# Altium PCB powersuppy.PcbDoc (part 1 of 2)
Units mm, origin at the board's own origin, x right, y up, seen from the top; angles counter-clockwise.
Board outline 153.8 x 127.13 mm, 2 copper layers (Top Layer, Bottom Layer); 131 components, 99 nets, 426 pads, 176 vias.
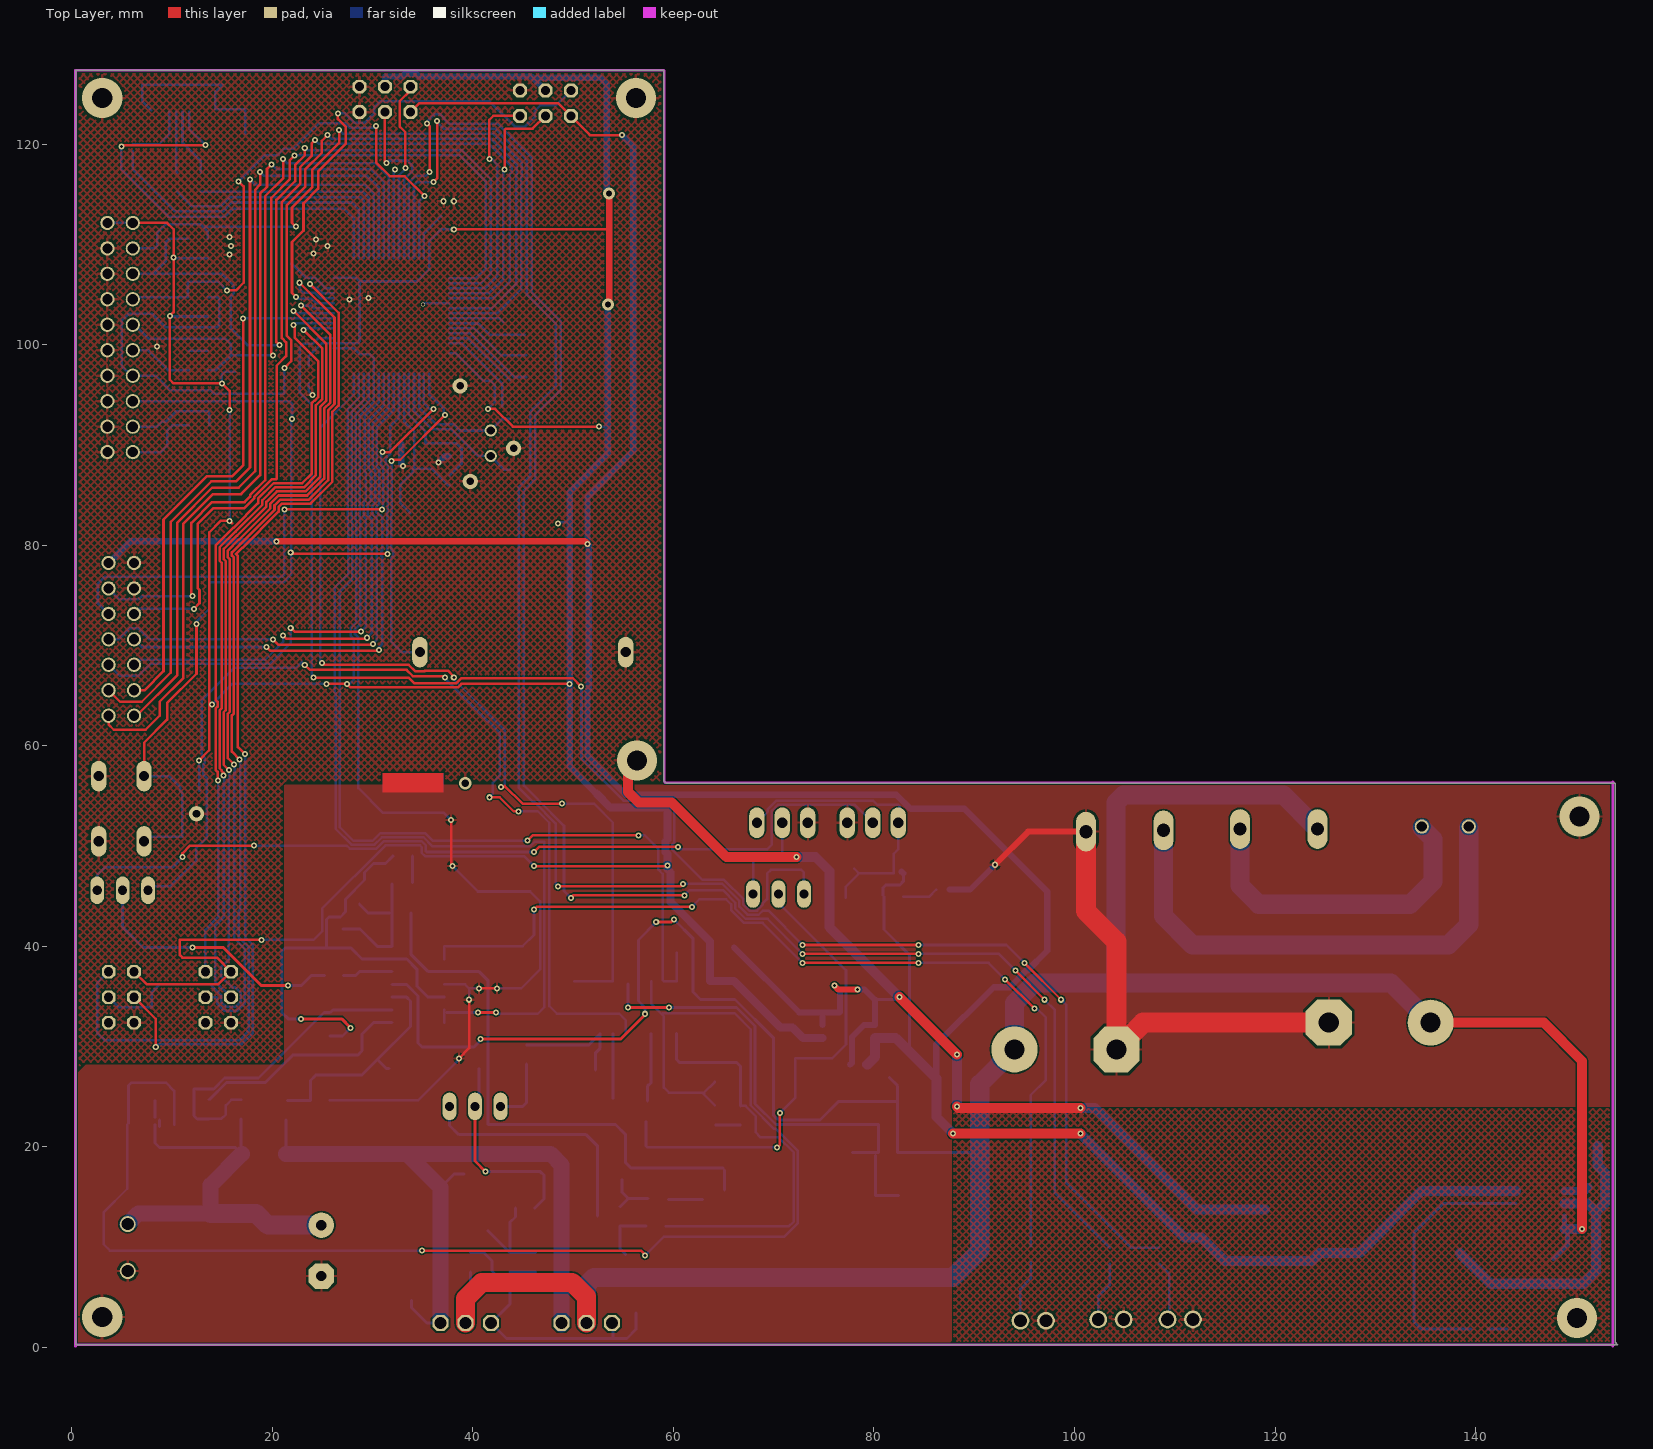
[diagram p0: Top Layer view]
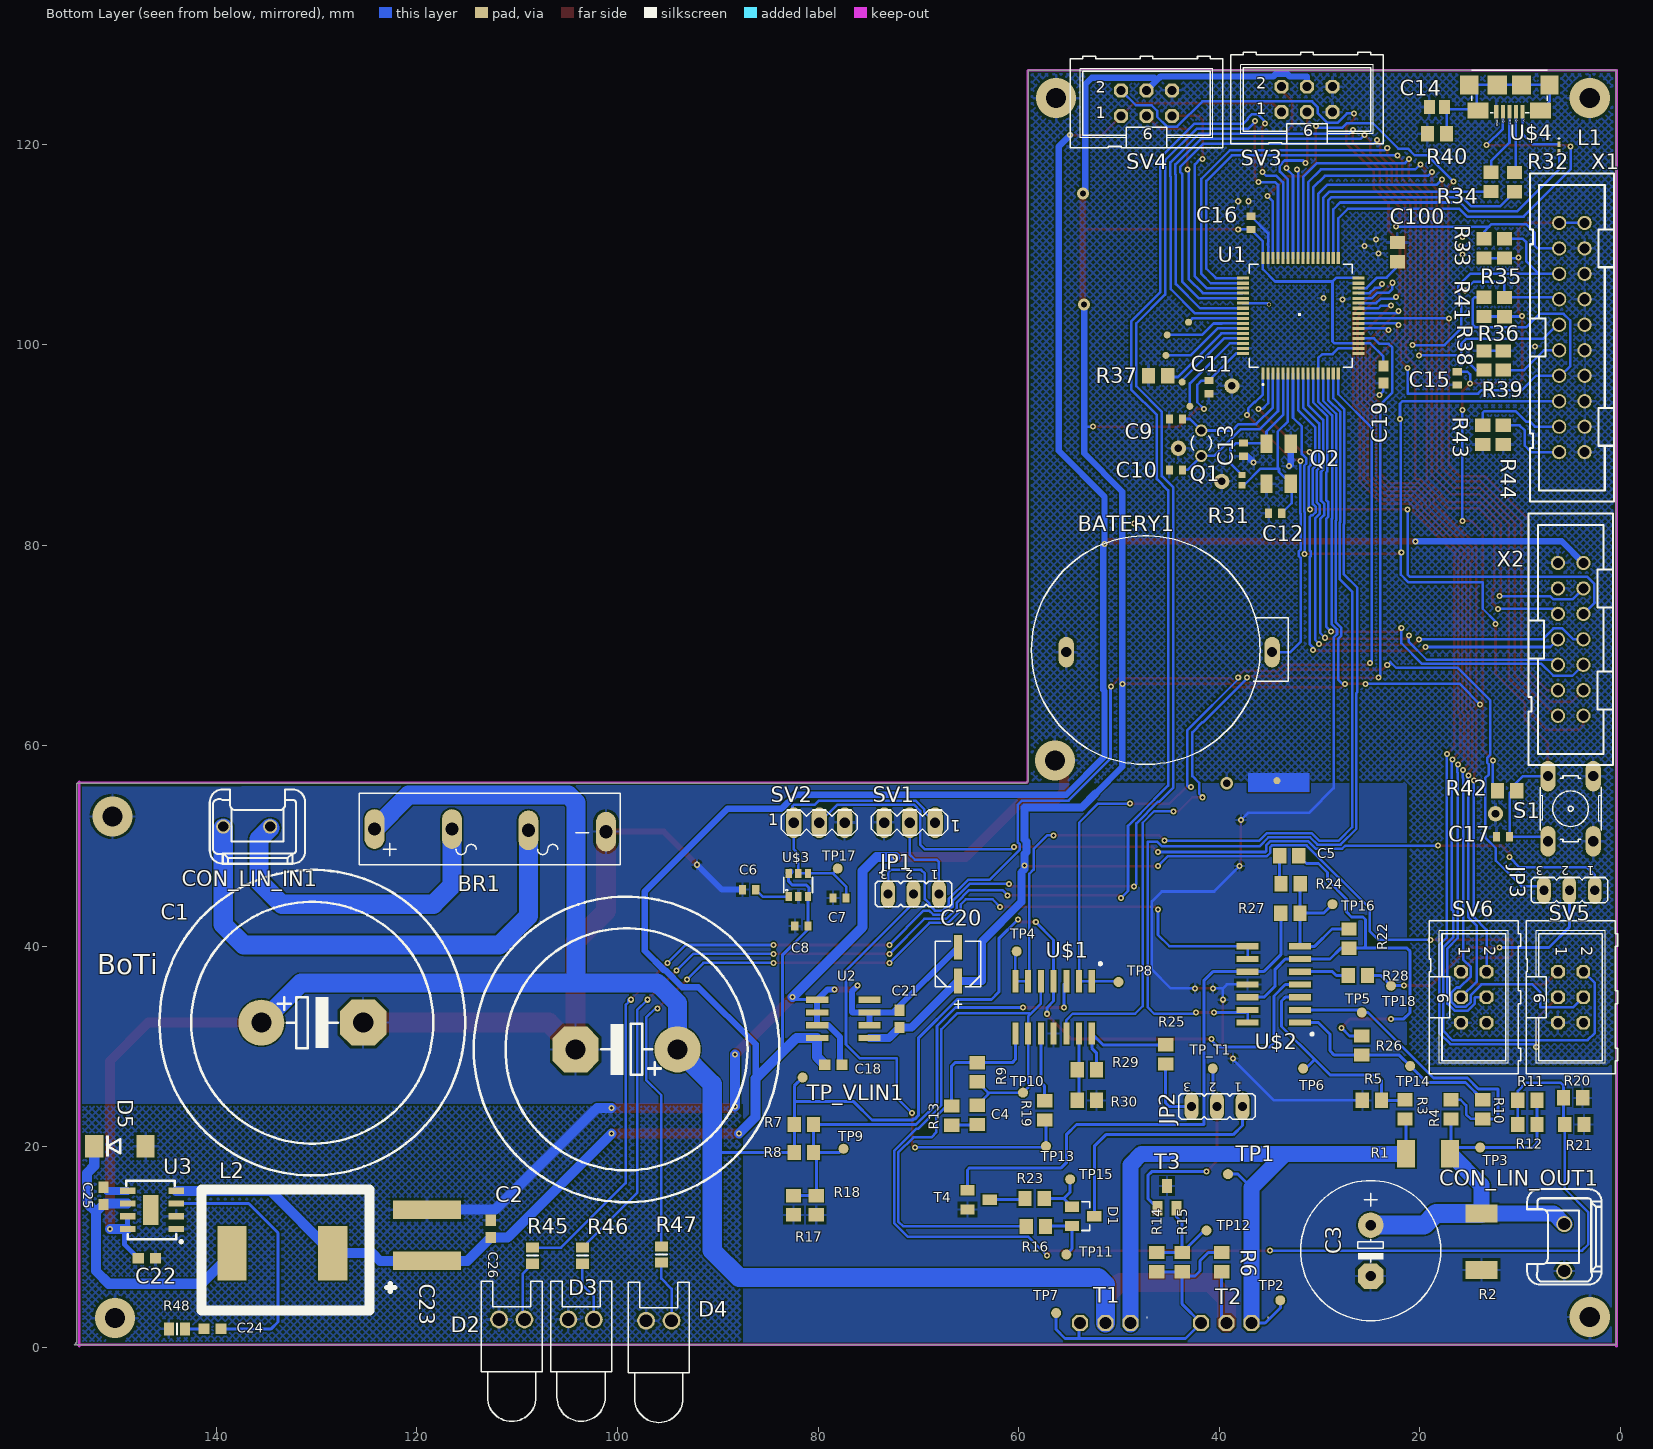
[diagram p1: Bottom Layer view, seen from below]

## Layer stack, top to bottom
Top Solder: solder mask 0.0102, Solder Resist, Dk 3.5
Top Layer: signal copper 0.0356
Dielectric 1: dielectric 0.32, FR-4, Dk 4.8
Bottom Layer: signal copper 0.0356
Bottom Solder: solder mask 0.0102, Solder Resist, Dk 3.5

## Board outline
0.381,127.382 0.411,127.352 59.056,127.352 59.056,56.475 59.27,56.261 153.924,56.261 153.924,0.508 154.178,0.254 0.381,0.254

## Design rules (kind name [scope] priority, off if disabled: settings)
Clearance [All] p1: gap=0.152 ignorepadtopadclearanceinfootprint=FALSE
ComponentClearance [All] p1 off: gap=0.254 collisioncheckmode=3 verticalgap=0.254 showdistances=FALSE
PolygonConnect [All] p1: connectstyle=Relief reliefconductorwidth=0.254 reliefentries=4 polygonreliefangle="90 Angle" airgapwidth=0.254
RoutingVias [All] p1: holewidth=0.3 width=0.6 viastyle="Through Hole" minholewidth=0.3 minwidth=0.6 maxholewidth=0.711 maxwidth=1.27
SolderMaskExpansion [All] p1: expansion=0.102
Width [All] p1: maxlimit=2.54 minlimit=0.254 preferedwidth=0.254
29 further rules are at their usual default settings.

## Classes and differential pairs
component class powersupply_grid8_0: BR1 C1 C2 C3 C4 C5 C6 C7 C8 CON_LIN_IN1 CON_LIN_OUT1 D1 D4 JP1 JP2 JP3 R1 R2 R3 R4 R5 R6 R7 R8 R9 R10 R11 R12 R13 R14 R15 R16 R17 R18 R19 R20 R21 R22 R23 R24 R25 R26 R27 R28 R29 R30 R47 SV1 SV2 T1 T2 T3 T4 TP1 TP2 TP3 TP4 TP5 TP6 TP7 TP8 TP9 TP10 TP11 TP12 TP13 TP14 TP15 TP16 TP17 TP18 TP_T1 TP_VLIN1 U$1 U$2 U$3
component class powersupply_grid8_1: BATERY1 C9 C10 C11 C12 C13 C14 C15 C16 C17 C18 C19 C20 C21 C22 C23 C24 C25 C26 C100 D2 D3 D5 L1 L2 Q1 Q2 R31 R32 R33 R34 R35 R36 R37 R38 R39 R40 R41 R42 R43 R44 R45 R46 R48 S1 SV3 SV4 SV5 SV6 U1 U2 U3 U$4 U$5 U$6 X1 X2

## Components (designator, comment, footprint, x,y, rotation, side; value= is the part's Value field where it differs from the comment)
BATERY1 "101" KEYSTONE101 55.245,69.342 r270 bottom
BR1 "4GBJ406" FB100 110.236,51.689 r180 bottom
C1 "15000u" EB30D 130.442,32.385 r180 bottom
C2 "15000u" EB30D 99.098,29.718 r0 bottom
C3 "470U" E5-13 24.892,9.652 r270 bottom
C4 "10n" C0805#1 64.135,23.173 r90 bottom
C5 "10n" C0805#1 33.02,49.022 r180 bottom
C6 "100n" C0402 86.868,45.644 r0 bottom
C7 "100n" C0402 77.851,44.831 r0 bottom
C8 "100n" C0402 81.661,42.037 r0 bottom
C9 "10p" C0402 44.323,92.583 r180 bottom
C10 "10p" C0402 44.323,87.503 r180 bottom
C11 "100n" C0402 41.021,95.758 r270 bottom
C12 "20p" C0402 34.417,83.185 r0 bottom
C13 "20p" C0402 37.592,89.535 r270 bottom
C14 "4.7n" C0805#2 18.288,123.698 r0 bottom
C15 "100n" C0402 16.256,96.647 r270 bottom
C16 "100n" C0402 36.83,112.141 r90 bottom
C17 "100n" C0402 11.684,50.927 r0 bottom
C18 "100n" C0603 78.486,28.194 r180 bottom
C19 "100n" C0603 23.622,97.028 r270 bottom
C20 "2.2u" CAPAE430X610N 66.04,38.227 r90 bottom
C21 "100n" C0603 71.882,32.766 r90 bottom
C22 "100n" C0603 146.939,8.89 r180 bottom
C23 "100u" C2225K 118.999,11.176 r90 bottom
C24 "22n" C0603 140.386,1.859 r0 bottom
C25 "220n" C0603 151.257,15.113 r90 bottom
C26 "220n" C0603 112.649,11.811 r90 bottom
C100 "4.7u" C0805#1 22.225,109.22 r90 bottom
CON_LIN_IN1 "POWERCON" MKS1852-6-0-202#1 135.89,51.943 r0 bottom
CON_LIN_OUT1 "POWERCON" MKS1852-6-0-202#2 5.588,11.049 r270 bottom
D1 "BA70-06" SOT23 53.569,13.081 r270 bottom
D2 "LED0" LED-0 110.549,2.785 r180 bottom
D3 "LED0" LED-0 103.632,2.794 r180 bottom
D4 "LED0" LED-0 95.885,2.667 r180 bottom
D5 "VS-10BQ100-M3/5BT" DO214AA 149.632,20.066 r180 bottom
JP1 "JP2E" JP2 70.485,45.212 r0 bottom
JP2 "JP2E" JP2 40.222,24.036 r0 bottom
JP3 "JP2E" JP2 5.08,45.593 r0 bottom
L1 "WE-CBF_0603" 0603 6.096,119.634 r270 bottom
L2 "DE1207-47" DE1207 140.208,9.017 r270 bottom
Q1 "32k" TC26V 41.783,90.17 r90 bottom
Q2 "ABM3B" ABM3B 32.258,85.217 r90 bottom
R1 "0.33" R2010 19.177,19.304 r180 bottom
R2 "4.7K" R2512 13.843,10.541 r90 bottom
R3 "100k" R0805 21.463,23.749 r270 bottom
R4 "100k" R0805 16.891,23.749 r270 bottom
R5 "330K" R0805 24.765,24.638 r0 bottom
R6 "10k" R0805 39.751,8.509 r270 bottom
R7 "20k" R0805 81.407,22.225 r0 bottom
R8 "20k" R0805 81.407,19.431 r0 bottom
R9 "1M" R0805 64.135,27.432 r90 bottom
R10 "330K" R0805 13.716,23.749 r270 bottom
R11 "20k" R0805 9.271,24.638 r180 bottom
R12 "20k" R0805 9.271,22.225 r180 bottom
R13 "100" R0805 66.675,23.114 r90 bottom
R14 "1k" R0805 46.228,8.509 r270 bottom
R15 "1.2k" R0805 43.688,8.509 r270 bottom
R16 "1k" R0805 58.293,12.065 r180 bottom
R17 "2.2k" R0805 82.461,14.17 r90 bottom
R18 "2.2k" R0805 80.182,14.17 r90 bottom
R19 "100" R0805 57.404,23.622 r90 bottom
R20 "2.2k" R0805 4.699,24.892 r0 bottom
R21 "2.2k" R0805 4.572,22.225 r0 bottom
R22 "1M" R0805 27.051,40.767 r90 bottom
R23 "100" R0805 58.42,14.859 r180 bottom
R24 "100" R0805 32.893,46.228 r180 bottom
R25 "10" R0805 45.339,29.21 r90 bottom
R26 "1k" R0805 25.781,30.099 r90 bottom
R27 "1k" R0805 32.893,43.307 r0 bottom
R28 "1k" R0805 26.162,37.084 r0 bottom
R29 "1k" R0805 53.213,27.686 r180 bottom
R30 "1k" R0805 53.213,24.638 r180 bottom
R31 "1M" R0402 37.719,86.487 r270 bottom
R32 "10" R0805 10.541,116.205 r270 bottom
R33 "10k" R0805 13.589,109.601 r270 bottom
R34 "10" R0805 12.89,116.23 r270 bottom
R35 "10k" R0805 11.557,109.601 r270 bottom
R36 "10k" R0805 11.557,103.759 r270 bottom
R37 "10k" R0805 46.101,96.901 r180 bottom
R38 "10k" R0805 13.589,98.425 r270 bottom
R39 "10k" R0805 11.684,98.425 r270 bottom
R40 "1M" R0805 18.288,121.031 r180 bottom
R41 "10k" R0805 13.589,103.759 r90 bottom
R42 "10k" R0805 11.303,55.499 r180 bottom
R43 "10k" R0805 13.716,90.993 r90 bottom
R44 "10k" R0805 11.684,90.993 r90 bottom
R45 "Res2" 6-0805_L 108.458,9.144 r270 bottom value=100
R46 "Res2" 6-0805_L 103.505,9.144 r270 bottom value=100
R47 "Res2" 6-0805_L 95.631,9.271 r270 bottom value=100
R48 "Res2" 6-0805_L 143.942,1.859 r180 bottom value=22k
S1 "10-XX" B3F-10XX 4.953,53.721 r270 bottom
SV1 "MA03-1" MA03-1 70.866,52.324 r0 bottom
SV2 "MA03-1" MA03-1 79.883,52.324 r180 bottom
SV3 "ML6" ML6 31.242,124.46 r180 bottom
SV4 "ML6" ML6 47.244,124.079 r180 bottom
SV5 "ML6" ML6 4.953,34.925 r270 bottom
SV6 "ML6" ML6 14.605,34.925 r270 bottom
T1 "IRL640PBF" TO-220AB 53.848,2.413 r180 bottom
T2 "IRL640PBF" TO-220AB 41.783,2.413 r180 bottom
T3 "BC856" SOT23-BEC 45.212,14.986 r180 bottom
T4 "NPN BC847" SOT23-BEC 64.008,14.732 r270 bottom
TP1 "TPB2,54" B2,54 39.116,17.272 r90 bottom
TP2 "TPB2,54" B2,54 33.909,4.699 r90 bottom
TP3 "TPB2,54" B2,54 13.97,19.939 r90 bottom
TP4 "TPB2,54" B2,54 60.198,39.497 r90 bottom
TP5 "TPB2,54" B2,54 25.781,33.401 r90 bottom
TP6 "TPB2,54" B2,54 31.623,27.813 r270 bottom
TP7 "TPB2,54" B2,54 56.261,3.429 r90 bottom
TP8 "TPB2,54" B2,54 50.038,36.449 r90 bottom
TP9 "TPB2,54" B2,54 77.47,19.812 r90 bottom
TP10 "TPB2,54" B2,54 59.563,25.4 r90 bottom
TP11 "TPB2,54" B2,54 55.245,9.271 r90 bottom
TP12 "TPB2,54" B2,54 41.275,11.651 r90 bottom
TP13 "TPB2,54" B2,54 57.277,20.066 r90 bottom
TP14 "TPB2,54" B2,54 20.955,28.067 r90 bottom
TP15 "TPB2,54" B2,54 54.864,16.764 r90 bottom
TP16 "TPB2,54" B2,54 28.702,44.196 r90 bottom
TP17 "TPB2,54" B2,54 78.041,47.752 r90 bottom
TP18 "TPB2,54" B2,54 22.86,36.068 r90 bottom
TP_T1 "TPB2,54" B2,54 40.64,27.813 r270 bottom
TP_VLIN1 "TPB2,54" B2,54 81.534,26.924 r270 bottom
U1 "STM32F7X2RXT" LQFP64-10X10MM 31.877,102.87 r90 bottom
U2 "KF33D" SO8 77.47,32.766 r90 bottom
U3 "IFX91041" PG-DSO-8-27 143.256,11.429 r90 bottom
U$1 "LM324" SO14 56.515,33.909 r0 bottom
U$2 "LM324" SO14 34.544,36.195 r90 bottom
U$3 "MAX6070" SOT23-6 81.978,46.101 r180 bottom
U$4 "USB_MICROB" USB_MICROB_PACKAGE 11.049,122.555 r0 bottom
X1 "2520-" PAK100/2500-20 4.826,100.711 r270 bottom
X2 "2514-" PAK100/2500-14 4.953,70.612 r270 bottom

## Footprints (in the part's own frame and the unit in brackets; to place one, negate y for a bottom-side part, rotate by r counter-clockwise, add the part's x,y. Pads: shape width x height; smd on the part's side, far side on the other; paste and mask are expansions set on the pad)
6-0805_L [mm] "Chip Resistor, Body 2.0x1.2mm, IPC High Density"
  rect 1x1.3 smd: 1(-0.8,0) 2(0.8,0)
  silkscreen extent 0,-0.55 0,0.55, body extent -1.07,-0.7 1.07,0.7, height 0.7
0603 [mm] "Chip Inductor, Body 0.6x0.3mm, IPC High Density"
  rect 0.5x0.3 smd: 1(-0.35,0) 2(0.35,0)
  silkscreen extent -0.9,-0.05 -0.9,0.05, body extent -0.33,-0.18 0.33,0.18, height 0.55
ABM3B [mil]
  rect 71x48 smd: P$1(36,24) P$2(193,24) P$3(193,119) P$4(36,119)
B2,54 [mm]
  rrect100% 1x1 smd: TP(0,0)
B3F-10XX [mil]
  oval 120x60 hole 40: 1(-128,89) 2(128,89) 3(-128,-89) 4(128,-89)
  silkscreen extent -130,-120 130,120
C0402 [mil]
  rect 28x36 smd: 1(-25.59,0) 2(26,0)
C0603 [mil]
  rect 44x40 smd: 1(-33.46,0) 2(34,0)
C0805#1 [mil]
  rect 52x60 smd: 1(-37.4,0) 2(38,0)
C0805#2 [mil] "Chip Capacitor, Body 2.0x1.3mm, IPC High Density"
  rect 43.31x55.12 smd: 1(-29.53,0) 2(29.53,0)
  body extent -43,-29 43,29, height 55
C2225K [mil]
  rect 73x268 smd: 1(-100.39,0) 2(101,0)
CAPAE430X610N [mil]
  rect 97x30 smd: 1(-66,0) 2(66,0)
  silkscreen extent -173,-89 89,89
DE1207 [mm]
  rect 5.4x2.9 smd: 1(-0.381,1.778) 2(-0.381,11.811)
  silkscreen extent -6.73,-1.27 5.33,15.49
DO214AA [mil]
  rect 71x87 smd: A(101,0) C(-100.39,0)
  silkscreen extent -55,-41 2,42
E5-13 [mil]
  round 100 hole 40: +(-100,0)
  oct 100x100 hole 40: -(100,0)
  silkscreen extent -275,-275 275,275
EB30D [mil]
  round 181 hole 79: +(-200,0)
  oct 181x181 hole 79: -(200,0)
  silkscreen extent -600,-600 600,600
FB100 [mil]
  oval 78x156 hole 52: +(-551.18,0) -(358,-10) AC1(-247.18,0) AC2(53,-5)
  silkscreen extent -611,-140 414,140
JP2 [mil]
  oval 54x108 hole 36: 1(-100,0) 2(0,0) 3(100,0)
  silkscreen extent -150,-50 150,50
KEYSTONE101 [mil]
  oval 120x60 hole 40: P$1(0,0) P$2(0,808)
  silkscreen extent -457,-137 441,871
LED-0 [mil] "LED; 2 Leads"
  round 70 hole 50: 1(50,0) 2(-50,0)
  silkscreen extent -120,-400 120,150
LQFP64-10X10MM [mil]
  rect 47x12 smd: 1(-226.38,148) 2(-226.38,128) 3(-226.38,109) 4(-226.38,89) 5(-226.38,69) 6(-226.38,50) 7(-226.38,30) 8(-226.38,10) 9(-226.38,-9.84) 10(-226.38,-29.53) 11(-226.38,-49.21) 12(-226.38,-68.9) 13(-226.38,-88.58) 14(-226.38,-108.27) 15(-226.38,-127.95) 16(-226.38,-147.64) 33(227,-147.64) 34(227,-127.95) 35(227,-108.27) 36(227,-88.58) 37(227,-68.9) 38(227,-49.21) 39(227,-29.53) 40(227,-9.84) 41(227,10) 42(227,30) 43(227,50) 44(227,69) 45(227,89) 46(227,109) 47(227,128) 48(227,148)
  rect 12x47 smd: 17(-147.64,-226.38) 18(-127.95,-226.38) 19(-108.27,-226.38) 20(-88.58,-226.38) 21(-68.9,-226.38) 22(-49.21,-226.38) 23(-29.53,-226.38) 24(-9.84,-226.38) 25(10,-226.38) 26(30,-226.38) 27(50,-226.38) 28(69,-226.38) 29(89,-226.38) 30(109,-226.38) 31(128,-226.38) 32(148,-226.38) 49(148,227) 50(128,227) 51(109,227) 52(89,227) 53(69,227) 54(50,227) 55(30,227) 56(10,227) 57(-9.84,227) 58(-29.53,227) 59(-49.21,227) 60(-68.9,227) 61(-88.58,227) 62(-108.27,227) 63(-127.95,227) 64(-147.64,227)
  silkscreen extent -273,-202 202,202
MA03-1 [mil]
  oval 60x120 hole 40: 1(-100,0) 2(0,0) 3(100,0)
  silkscreen extent -150,-50 150,50
MKS1852-6-0-202#1 [mil]
  round 56 hole 40: 1(-49.21,0) 2(135,0)
  silkscreen extent -186,-145 188,146
MKS1852-6-0-202#2 [mil]
  round 62.99 hole 47.24: 1(-49.21,0) 2(135,0)
  silkscreen extent -186,-145 188,146
ML6 [mil]
  oct 54x54 hole 36: 1(-100,-50) 2(-100,50) 3(0,-50) 4(0,50) 5(100,-50) 6(100,50)
  silkscreen extent -300,-175 300,185
PAK100/2500-14 [mil]
  round 56 hole 40: 1(-300,-50) 2(-300,50) 3(-200,-50) 4(-200,50) 5(-100,-50) 6(-100,50) 7(0,-50) 8(0,50) 9(100,-50) 10(100,50) 11(200,-50) 12(200,50) 13(300,-50) 14(300,50)
  silkscreen extent -494,-165 494,166
PAK100/2500-20 [mil]
  round 56 hole 40: 1(-450,-50) 2(-450,50) 3(-350,-50) 4(-350,50) 5(-250,-50) 6(-250,50) 7(-150,-50) 8(-150,50) 9(-50,-50) 10(-50,50) 11(50,-50) 12(50,50) 13(150,-50) 14(150,50) 15(250,-50) 16(250,50) 17(350,-50) 18(350,50) 19(450,-50) 20(450,50)
  silkscreen extent -644,-165 644,166
PG-DSO-8-27 [mil]
  rect 25.2x60 smd: 1(15,30) 2(65,30) 3(115,30) 4(165,30) 5(165,220) 6(115,220) 7(65,220) 8(15,220)
  rect 118.11x60 smd: EXP(90,130)
  silkscreen extent -40,5 205,225
R0402 [mil]
  rect 24x28 smd: 1(-19.69,0) 2(20,0)
R0805 [mil]
  rect 52x60 smd: 1(-37.4,0) 2(38,0)
R2010 [mil]
  rect 71x107 smd: 1(-86.61,0) 2(87,0)
R2512 [mil]
  rect 71x126 smd: 1(-110.24,0) 2(111,0)
SO8 [mil]
  rect 24x87 smd: 1(-75,-102.36) 2(-25,-102.36) 3(25,-102.36) 4(75,-102.36) 5(75,103) 6(25,103) 7(-25,103) 8(-75,103)
SO14 [mil]
  rect 24x87 smd: 1(-150,-102.36) 2(-100,-102.36) 3(-50,-102.36) 4(0,-102.36) 5(50,-102.36) 6(100,-102.36) 7(150,-102.36) 8(150,103) 9(100,103) 10(50,103) 11(0,103) 12(-50,103) 13(-100,103) 14(-150,103)
SOT23 [mil]
  rect 40x56 smd: 1(-37.4,-43.31) 2(38,-43.31) 3(0,44)
  silkscreen extent -56,-6 56,26
SOT23-6 [mil]
  rect 24x36 smd: 1(-37.4,-45.28) 2(0,-45.28) 3(38,-45.28) 4(38,46) 5(0,46) 6(-37.4,46)
  silkscreen extent -56,-31 56,31
SOT23-BEC [mil]
  rect 40x56 smd: B(-37.4,-43.31) C(0,44) E(38,-43.31)
TC26V [mil]
  round 48 hole 32: 1(-50,0) 2(50,0)
  silkscreen extent -28,-40 29,40
TO-220AB [mm]
  oct 1.6x1.6 hole 1.2: P$1(-0.03,0.025) P$2(2.515,0.025) P$3(5.004,0.025)
  silkscreen extent 6.65,0.48 6.65,0.63
USB_MICROB_PACKAGE [mil]
  rect 16x54 smd: D+(0,-26.77) D-(-25.2,-26.77) GND(52,-26.77) ID(26,-26.77) V(-51.18,-26.77)
  rect 83x63 smd: PAD1(-122.05,-31.5) PAD2(123,-31.5)
  rect 71x75 smd: PAD3(-157.48,-131.89) PAD6(158,-131.89)
  rect 75x75 smd: PAD4(-47.24,-131.89) PAD5(48,-131.89)
  silkscreen extent -148,-189 148,-22

## Part data
C1 C2: library part CPOL-EUE10-30, "<B>POLARIZED CAPACITOR</B>, European symbol", +=+
C3: library part CPOL-EUE5-13, "<B>POLARIZED CAPACITOR</B>, European symbol", +=+
C4 C5 C14: library part C-EUC0805, "<B>CAPACITOR</B>, European symbol", SPICEPREFIX=C
C6 C7 C8 C9 C10 C11 C12 C13 C15 C16 C17: library part C-EUC0402, "<B>CAPACITOR</B>, European symbol", SPICEPREFIX=C
C18 C19 C21 C22 C24 C25 C26: library part C-EUC0603, "<B>CAPACITOR</B>, European symbol", SPICEPREFIX=C
C20: library part EEE--CASE-B, MPN=EEE-FT0J101AR, PACKAGE=CASE-B, TOLERANCE="±20 %", VOLTAGERATING=6.3V, OC_FARNELL=2065951, OC_NEWARK=73T9146, SUPPLIER=PANASONIC
C23: library part C-USC2225K, SPICEPREFIX=C
C100: library part C-EUC0805, SPICEPREFIX=C
D1: library part BAS40-06
D2 D3 D4: "Typical INFRARED GaAs LED", LatestRevisionDate=08-Jul-2005, LatestRevisionNote="Mech Layer 1 removed.", PackageDescription="LED; 2 Leads", PackageReference=LED-0, Published=8-Jun-2000, Publisher="Altium Limited"
D5: library part SCHOTTKY-DIODEAG
JP1 JP2 JP3: "<b>JUMPER</b>"
L1: "<b> SMD EMI Suppression Ferrite Beads WE-CBF</b> <p> /  / - Excellent anti-EMI properties <br> / - Low DC-restistance <br> / - Impedances till 3000 ohms <br> / - Rated current up to 6 A<p> /  / -- Reliable Ni-Sn electrodes<br> / -- Perfect as data lined filter and for uncoupling of distribution voltage<br>", MPN=742792695, PACKAGE=IND-0603, OC_FARNELL=1635699, OC_NEWARK=08P2449, SUPPLIER="Wuerth Elektronik"
L2: library part "DE 1207"
Q1: library part CRYSTALTC26V, "<b>CRYSTAL</b>", 1=1, 2=2, OC_FARNELL=unknown, OC_NEWARK=unknown
R1: library part R-EU_R2010, "<B>RESISTOR</B>, European symbol"
R2: library part R-EU_R2512, "<B>RESISTOR</B>, European symbol"
R3 R4 R5 R6 R7 R8 R9 R10 R11 R12 R13 R14 R15 R16 R17 R18 R19 R20 R21 R22 R23 R24 R25 R26 R27 R28 R29 R30 R32 R33 R34 R35 R36 R37 R38 R39 R40 R41 R42 R43 R44: library part R-EU_R0805, "<B>RESISTOR</B>, European symbol"
R31: library part R-EU_R0402, "<B>RESISTOR</B>, European symbol"
R45 R46 R47 R48: "Resistor", LatestRevisionDate=17-Jul-2002, LatestRevisionNote="Re-released for DXP Platform.", PackageDescription="Axial Device, Thru-Hole; 2 Leads; 0.4 in Pin Spacing", PackageReference=AXIAL-0.4, Published=8-Jun-2000, Publisher="Altium Limited"
S1: "<b>OMRON SWITCH</b>", MPN=B3F-1000, OC_FARNELL=176432, OC_NEWARK=36M3542
SV1 SV2: "<b>PIN HEADER</b>", OC_FARNELL=unknown, OC_NEWARK=unknown
SV3 SV4 SV5 SV6: "<b>HARTING</b>", OC_FARNELL=unknown, OC_NEWARK=unknown
T3: library part *-PNP-SOT23-BEC, "PNP Transistror"
T4: library part *-NPN-SOT23-BEC
TP1 TP2 TP3 TP4 TP5 TP6 TP7 TP8 TP9 TP10 TP11 TP12 TP13 TP14 TP15 TP16 TP17 TP18 TP_T1 TP_VLIN1: "<b>Test pad</b>"
U1: MANUFACTURER_PART_NUMBER=stm32f7x2rxt, VENDOR=STMicroelectronics
U3: "1.8A DC/DC Step-Down Voltage Regulator"
U$4: "This is the hirose ZX62-B-5PA(11) MICRO-USB B Type female connection.", USB=USB
X1 X2: "<b>3M (TM) Pak 100 4-Wall Header</b><p> / Source: 3M", OC_FARNELL=unknown, OC_NEWARK=unknown
U$1 U$2: V+=V+, V-=V-

## Free pads (board coordinates)
  round 1.524 hole 0.762: 3(12.446,53.213) 4(38.735,95.885) 5(39.751,86.36) 6(44.069,89.662)
  round 0.7 smd far side: 7(43.053,102.235) 8(34.244,56.515) 8(45.19,100.965) 9(45.317,98.933) 10(43.688,96.266) 11(42.926,93.853)

## Via types
v1: diameter 0.6, hole 0.3, Top Layer to Bottom Layer, 166 vias
v2: diameter 4, hole 2, Top Layer to Bottom Layer, 6 vias
v3: diameter 1.2, hole 0.6, Top Layer to Bottom Layer, 2 vias
v4: diameter 1.27, hole 0.711, Top Layer to Bottom Layer, 1 vias
v5: diameter 0.4, hole 0.3, Top Layer to Bottom Layer, 1 vias

## Nets (pads, with @x,y where several pads share a name; then routed paths per layer and width w, separated by ;. In a path a pad name is that pad's centre, name@x,y a point inside that pad or via, vN(x,y) a via of type N, cw(c..) or ccw(c..) an arc to the next point about the centre after c; other vN are vias at no path point)
+3V3: C11.1 C15.1 C16.1 C19.1 C20.1 C21.1 R33.2 R35.2 R36.2 R41.1 R42.1 SV3.4 SV4.4 SV5.1 SV6.1 U1.13 U1.19 U1.32 U1.48 U1.64 U2.1 X1.1 X1.2 | length 428.3
  Top Layer w0.254: X1.1@6.096,112.141 9.525,112.141 10.16,111.506 v1(10.16,108.712) 10.16,103.251 v1(9.779,102.87) 9.779,96.52 10.16,96.139 v1(14.986,96.139) 15.748,95.377 v1(15.748,93.472) ; SV5.1@6.223,37.465 7.493,36.195 14.605,36.195 SV6.1@15.875,37.465 14.478,38.862 11.049,38.862 10.795,39.116 10.795,40.64 v1(18.923,40.64) ; v1(12.7,58.547) 13.716,59.563 v1@13.716,64.135 ; v1(13.97,64.135) v1@13.716,64.135 ; 16.002,82.169 v1(15.748,82.423) 14.859,82.423 13.716,81.28 v1@13.716,64.135 ; v1(25.4,66.167) v1(27.432,66.167) 27.783,65.816 38.508,65.816 38.859,66.167 v1(49.657,66.167) ; v1(38.1,111.506) 53.594,111.506 ; v1(41.529,93.599) 42.217,93.599 43.995,91.821 v1(52.578,91.821) ; v1(46.101,48.006) 59.265,48.006 59.392,48.133 v1(59.392,48.05)
  Top Layer w0.635: v3(53.467,104.013) 53.594,104.14 53.594,111.506 v3(53.594,115.062)
  Bottom Layer w0.254: X1.2@3.556,112.141 X1.1@6.096,112.141 ; v1(9.779,102.87) 9.84,102.809 R41.1@13.589,102.809 ; v1(10.16,108.712) 10.236,108.636 R35.2@11.557,108.636 R33.2@13.589,108.636 ; v1(12.7,58.547) 12.7,55.56 R42.1@12.761,55.499 ; v1(13.97,64.135) 16.002,66.167 v1(25.4,66.167) ; v1(14.986,96.139) 14.986,97.028 15.255,97.297 C15.1@16.256,97.297 ; v1(15.748,82.423) v1(15.748,93.472) ; v1(18.923,40.64) 24.13,40.64 24.971,41.481 24.971,43.755 31.279,50.063 34.746,50.063 34.91,49.9 34.91,49.325 35.238,48.997 45.11,48.997 v1(46.101,48.006) ; C19.1@23.622,97.878 23.622,98.806 24.936,100.12 U1.19@26.127,100.12 28.492,100.12 28.702,100.33 28.702,106.299 ; U1.32@26.127,106.655 28.346,106.655 28.702,106.299 ; v1(27.432,66.167) 27.686,66.167 28.148,66.629 28.148,70.661 27.843,70.966 27.843,71.782 28.372,72.311 28.372,82.438 28.326,82.484 28.326,93.102 29.627,94.403 U1.13@29.627,97.12 ; U1.64@37.643,99.12 38.309,99.12 C11.1@41.021,96.408 41.768,96.408 42.186,95.99 42.186,94.256 v1(41.529,93.599) ; v1(38.1,111.506) 38.085,111.491 C16.1@36.83,111.491 35.636,110.297 U1.48@35.636,108.636 35.636,107.518 34.417,106.299 28.702,106.299 ; v1(48.514,82.169) 48.641,82.296 49.657,82.296 ; v1(52.578,91.821) 53.467,91.821
  Bottom Layer w0.635: SV3.4@31.242,125.73 31.242,126.746 32.961,126.746 33.202,126.987 34.362,126.987 34.603,126.746 45.847,126.746 46.228,126.365 ; SV4.4@47.244,125.349 46.228,126.365 ; 52.324,55.245 49.657,57.912 v1(49.657,66.167) 49.657,82.296 49.657,85.344 53.467,89.154 53.467,91.821 v3(53.467,104.013) ; v3(53.594,115.062) 53.34,115.316 53.34,125.959 52.692,126.606 46.469,126.606 46.228,126.365
  Bottom Layer w0.8: 52.324,55.245 53.715,53.854 59.392,53.854 59.392,50.631 59.193,50.432 59.193,49.39 59.392,49.191 v1(59.392,48.05) 59.392,47.725 59.734,47.382 59.734,44.406 63.652,40.488 63.652,36.551 C20.1@66.04,36.551 70.675,31.916 C21.1@71.882,31.916 72.937,30.861 U2.1@74.87,30.861
+5V: C8.1 C18.1 C23.1 C26.1 L2.2 SV3.1 SV4.1 U2.8 U3.4 U$3.3 U$3.6 X2.2 | length 313.7
  Top Layer w0.254: SV3.1@33.782,123.19 34.671,124.079 48.514,124.079 SV4.1@49.784,122.809 51.689,120.904 v1(54.864,120.904)
  Top Layer w0.635: v1(20.447,80.391) 51.181,80.391 v1(51.435,80.137)
  Top Layer w1: v1(87.884,21.336) v1(100.584,21.336)
  Bottom Layer w0.3: C8.1@81.011,42.037 81.011,41.671 83.566,39.116 83.566,29.464 ; C8.1@81.013,42.039 U$3.3@81.013,44.951 80.899,45.065 80.899,45.847 81.153,46.101 82.55,46.101 82.928,46.479 U$3.6@82.928,47.269
  Bottom Layer w0.635: X2.2@3.683,78.232 5.842,80.391 v1(20.447,80.391) ; v1(54.864,120.904) 56.007,119.761 56.007,89.408 51.435,84.836 v1(51.435,80.137) 51.57,80.002 51.57,65.594 51.435,65.459 51.435,58.96 55.264,55.131 82.238,55.131 83.655,53.714 89.034,53.714 97.282,45.466 97.282,39.551 95.315,37.584 95.188,37.584 93.537,35.933 91.94,35.933 86.233,30.226 86.233,26.797 ; U$3.6@82.752,47.445 U$3.6@82.928,47.269
  Bottom Layer w1: C18.1@79.336,28.194 80.086,28.944 U2.8@80.086,30.861 82.169,30.861 83.566,29.464 86.233,26.797 86.233,22.987 v1(87.884,21.336) ; v1(100.584,21.336) 110.959,10.961 C26.1@112.649,10.961 114.984,8.626 C23.1@118.999,8.626 123.688,8.626 124.46,9.398 L2.2@128.397,9.398 134.619,15.62 U3.4@144.018,15.62
AGND: BR1.- C1.- C2.- C3.- C6.2 C7.2 C8.2 CON_LIN_OUT1.2 R2.1 R5.2 R17.1 R18.1 R20.1 R21.1 R30.2 SV1.3 SV2.3 T3.C T4.E U1.12 U1.18 U$1.11 U$2.11 U$3.2 | length 174.3
  Top Layer w0.254: v1(37.846,52.578) 37.846,48.133 v1(37.973,48.006) ; v1(38.608,28.829) 39.624,29.845 v1(39.624,34.671) ; v1(40.64,35.814) v1(42.418,35.814)
  Top Layer w0.6: v1(92.075,48.133) 95.377,51.435 BR1.-@101.143,51.435
  Top Layer w2: BR1.-@101.143,51.435 101.143,43.51 104.178,40.475 C2.-@104.178,29.718 106.845,32.385 C1.-@125.362,32.385
  Bottom Layer w0.254: R5.2@25.73,24.638 34.544,24.638 38.608,28.702 v1(38.608,28.829) ; U1.18@26.127,99.62 28.142,99.62 28.702,99.06 29.718,99.06 30.127,98.651 U1.12@30.127,97.12 30.127,94.329 28.732,92.934 28.732,82.653 28.778,82.607 28.778,72.143 28.25,71.614 28.25,71.134 28.589,70.795 28.589,55.767 31.016,53.34 37.084,53.34 v1(37.846,52.578) ; U$2.11@37.16,36.195 39.243,36.195 39.624,35.814 ; v1(37.973,48.006) 40.513,45.466 45.72,45.466 46.711,44.475 46.711,37.694 44.831,35.814 v1(42.418,35.814) ; v1(39.624,34.671) 39.624,35.814 ; v1(40.64,35.814) 39.624,35.814
  Bottom Layer w0.6: C6.2@87.528,45.644 89.586,45.644 v1(92.075,48.133)
  other v2: 3.048,3.048 150.368,52.959
DGND: BATERY1.P$1 C9.1 C10.1 C11.2 C12.2 C13.2 C14.2 C15.2 C16.2 C17.2 C18.2 C19.2 C20.2 C21.2 C22.2 C23.2 C26.2 C100.2 D2.2 D3.2 D4.2 D5.A pad.3 pad.4 pad.5 pad.6 pad.8@34.244,56.515 Q2.P$2 Q2.P$4 R37.1 R38.1 R39.1 R40.1 R43.1 R44.1 R48.1 S1.1 S1.2 SV3.5 SV3.6 SV4.6 SV5.5 SV6.5 U1.31 U1.47 U1.63 U2.2 U2.3 U2.5 U2.6 U2.7 U3.1 U3.2 U$4.GND X1.4 X1.6 X1.8 X1.10 X1.12 X1.14 X1.16 X1.18 X1.20 X2.1 X2.3 | length 135
  Top Layer w0.6: v1(76.073,36.068) 76.454,35.687 v1(78.359,35.687)
  Top Layer w1: v2(56.388,58.543) 55.499,57.654 55.499,55.372 56.515,54.356 59.817,54.356 65.278,48.895 v1(72.263,48.895) ; v1(82.55,34.925) v1(88.265,29.21) ; v1(88.265,24.017) 88.406,23.876 v1(100.619,23.876)
  Bottom Layer w0.254: R39.1@11.684,99.375 R38.1@13.589,99.375 ; C19.2@23.622,96.164 23.622,95.377 v1(24.003,94.996) ; U1.47@35.128,108.636 35.128,111.1 C16.2@36.83,112.801
  Bottom Layer w0.3: U2.5@80.086,34.671 82.296,34.671 v1(82.55,34.925)
  Bottom Layer w0.6: C20.2@66.04,39.903 72.542,33.401 U2.3@74.87,33.401 ; U2.2@74.87,32.131 U2.3@74.87,33.401 ; v1(76.073,36.068) 76.637,35.504 76.637,33.457 76.581,33.401 U2.3@74.87,33.401 ; C18.2@77.622,28.194 77.795,28.367 77.795,30.932 78.994,32.131 U2.7@80.086,32.131 U2.6@80.086,33.401 U2.5@80.086,34.671 79.07,35.687 v1(78.359,35.687)
  Bottom Layer w0.635: Q2.P$2@32.868,90.119 32.868,88.036 v1(33.02,87.884) ; v1(36.576,88.265) 37.186,88.875 C13.2@37.592,88.875
  Bottom Layer w1: v1(72.263,48.895) 74.168,48.895 75.565,47.498 75.565,41.91 v1(82.55,34.925) ; v1(88.265,24.017) v1(88.265,29.21) ; v1(100.619,23.876) 102.056,23.876 112.19,13.741 C23.2@118.999,13.741
  other v1: 8.509,99.822 27.686,104.521 29.591,104.648 15.748,108.966 24.13,109.093 15.875,109.855 25.527,109.855 24.384,110.49 15.748,110.744 37.084,114.3 38.1,114.3
  other v2: 150.114,2.921 3.048,124.587 56.261,124.587
  other v4: 39.243,56.261
FEEDBACK_LIN: C4.2 R9.1 R11.1 R12.1 R20.2 R21.2 TP10.TP U$1.5 U$1.9 | length 145.7
  Top Layer w0.254: v1(34.925,9.652) 56.769,9.652 57.15,9.271 v1(57.15,9.144)
  Bottom Layer w0.254: R21.2@5.537,22.225 5.537,15.824 3.175,13.462 3.175,10.287 3.81,9.652 v1(34.925,9.652) ; R21.2@5.664,22.352 R20.2@5.664,24.892 5.664,26.111 5.969,26.416 9.398,26.416 10.221,25.593 R11.1@10.221,24.638 R12.1@10.221,22.225 ; v1(57.15,9.144) 59.03,11.024 71.034,11.024 72.415,12.405 72.415,19.599 70.219,21.796 70.053,21.796 67.716,24.132 67.716,31.725 66.111,33.33 58.984,33.33 58.864,33.21 ; U$1.5@57.785,36.509 57.785,34.29 58.864,33.21 ; C4.2@64.135,24.138 63.053,25.22 63.053,25.4 ; R9.1@64.135,26.482 63.053,25.4 ; 58.864,33.21 59.055,33.02 U$1.9@59.055,31.293 59.055,25.908 TP10.TP@59.563,25.4 63.053,25.4
IDAC: JP3.3 U$1.12 | length 98
  Top Layer w0.254: v1(23.241,68.072) 23.749,67.564 33.403,67.564 34.038,66.929 37.119,66.929 v1(37.246,66.802) ; v1(41.656,54.864) 42.672,54.864 44.069,53.467 v1(44.577,53.467)
  Bottom Layer w0.254: JP3.3@7.874,45.999 9.862,45.999 12.421,48.558 12.421,49.795 13.487,50.862 13.487,56.769 13.106,57.15 13.106,58.134 13.279,58.307 13.279,58.787 12.984,59.082 12.984,64.543 16.203,67.762 22.342,67.762 22.946,68.367 ; v1(37.246,66.802) 37.246,66.693 41.582,62.357 41.656,62.357 42.672,61.341 42.672,56.97 41.991,56.289 41.991,55.199 v1(41.656,54.864) ; v1(44.577,53.467) 46.482,53.467 47.625,52.324 47.625,34.036 48.387,33.274 54.61,33.274 55.245,32.639 U$1.12@55.245,31.293
IMEAS: U1.15 U$2.13 U$2.14 | length 96.7
  Top Layer w0.254: v1(40.513,33.401) v1(42.291,33.401)
  Bottom Layer w0.254: U1.15@28.627,97.12 28.627,94.667 27.513,93.553 27.513,82.148 27.559,82.102 27.559,77.089 26.23,75.76 26.23,65.355 26.332,65.253 26.332,51.707 27.899,50.14 30.205,50.14 30.942,50.876 35.083,50.876 35.992,49.967 45.706,49.967 46.158,50.419 47.117,50.419 47.117,33.909 46.482,33.274 42.291,33.274 v1(42.291,33.401) ; U$2.14@37.16,32.385 U$2.13@37.16,33.655 ; U$2.13@37.414,33.401 v1(40.513,33.401)
IPOT: JP3.1 SV2.2 | length 86.4
  Top Layer w0.254: v1(11.049,48.895) 11.049,49.276 11.811,50.038 v1(18.161,50.038) ; v1(46.101,49.403) 46.609,49.911 v1(60.452,49.911)
  Bottom Layer w0.254: JP3.1@2.54,45.593 2.54,47.117 3.302,47.879 10.033,47.879 v1(11.049,48.895) ; v1(18.161,50.038) 27.426,50.038 27.73,49.733 30.374,49.733 31.11,50.47 34.914,50.47 35.316,50.068 35.316,49.493 35.407,49.403 v1(46.101,49.403) ; v1(60.452,49.911) 60.706,49.657 69.342,49.657 69.825,50.14 69.825,53.517 70.435,54.127 78.08,54.127 SV2.2@79.883,52.324
JNTRST: R33.1 U1.56 X1.3 | length 71.7
  Top Layer w0.254: v1(22.352,111.76) 21.971,112.141 21.971,113.665 23.984,115.678 23.984,117.41 26.67,120.096 v1(26.67,121.412)
  Bottom Layer w0.254: X1.3@6.096,109.601 8.255,109.601 8.509,109.855 8.509,111.125 9.398,112.014 12.827,112.014 13.081,111.76 ; R33.1@13.589,110.551 13.589,111.252 13.081,111.76 ; v1(22.352,111.76) 13.081,111.76 ; v1(26.67,121.412) 27.051,121.031 42.024,121.031 44.877,118.178 44.877,116.772 44.831,116.726 44.831,105.537 42.418,103.124 U1.56@37.643,103.124
JTCLK: R38.2 U1.49 X1.9 | length 72.7
  Top Layer w0.254: v1(20.066,98.933) 19.897,99.102 19.897,114.639 21.763,116.505 21.763,118.41 v1(22.225,118.872)
  Bottom Layer w0.254: X1.9@6.096,101.981 6.333,101.981 7.73,100.584 15.367,100.584 15.875,100.076 15.875,98.933 ; R38.2@13.589,97.46 14.402,97.46 15.875,98.933 ; v1(20.066,98.933) 15.875,98.933 ; v1(22.225,118.872) 38.735,118.872 41.275,116.332 41.275,107.569 40.335,106.629 U1.49@37.643,106.629
JTDI: R35.1 U1.50 X1.5 | length 81.3
  Top Layer w0.254: v1(20.701,99.949) 20.405,100.245 20.405,114.429 22.271,116.295 22.271,117.902 23.241,118.872 v1(23.241,119.634)
  Bottom Layer w0.254: X1.5@6.096,107.061 8.128,107.061 ; R35.1@11.557,110.551 9.713,110.551 9.398,110.236 9.398,108.331 8.128,107.061 ; v1(20.701,99.949) 17.526,99.949 15.875,101.6 15.875,104.828 16.175,105.128 16.175,105.872 14.986,107.061 8.128,107.061 ; v1(23.241,119.634) 23.495,119.38 38.945,119.38 41.783,116.542 41.783,107.061 40.843,106.121 U1.50@37.643,106.121
JTDO: R41.2 U1.55 X1.13 | length 103.9
  Top Layer w0.254: v1(21.209,97.663) 21.89,98.344 21.89,100.441 21.463,100.868 21.463,113.919 23.287,115.743 23.287,117.475 24.938,119.126 24.938,120.315 v1(25.527,120.904)
  Bottom Layer w0.254: R41.2@13.589,104.724 14.529,104.724 14.732,104.521 14.732,101.991 14.494,101.752 9.367,101.752 8.046,103.073 5.644,103.073 5.004,102.433 5.004,97.841 5.944,96.901 X1.13@6.096,96.901 8.382,96.901 9.823,95.46 13.843,95.46 14.18,95.123 21.209,95.123 v1(21.209,97.663) ; v1(25.527,120.904) 25.908,120.523 41.813,120.523 44.369,117.967 44.369,116.983 44.323,116.937 44.323,106.045 41.91,103.632 U1.55@37.643,103.632
JTMS: R36.1 U1.46 X1.7 | length 56.3
  Top Layer w0.254: v1(15.494,105.41) 16.383,105.41 17.145,106.172 17.145,115.771 v1(16.637,116.279) ; v1(30.353,121.793) 30.353,118.163 31.722,116.794 33.193,116.794 v1(35.179,114.808)
  Bottom Layer w0.254: X1.7@6.096,104.521 6.284,104.709 R36.1@11.557,104.709 11.557,106.172 11.659,106.274 14.63,106.274 v1(15.494,105.41) ; v1(16.637,116.279) 19.23,118.872 20.5,118.872 21.181,119.553 22.144,119.553 24.684,122.093 27.259,122.093 27.737,121.615 30.175,121.615 v1(30.353,121.793) ; U1.46@34.646,108.636 34.646,114.275 v1(35.179,114.808)
LCD_D0: U1.8 X2.7 | length 53.9
  Top Layer w0.254: v1(19.431,69.85) 19.796,69.485 30.563,69.485 v1(30.641,69.562)
  Bottom Layer w0.254: X2.7@6.223,70.612 6.985,69.85 v1(19.431,69.85) ; v1(30.641,69.562) 30.641,69.807 30.95,70.116 30.95,78.848 30.891,78.906 30.891,79.386 30.95,79.445 30.95,82.851 30.815,82.987 30.697,82.987 30.358,83.326 30.358,83.806 30.658,84.106 30.658,87.642 30.439,87.861 30.439,91.78 32.131,93.472 U1.8@32.131,97.12
LCD_D1: U1.9 X2.8 | length 55.7
  Top Layer w0.254: v1(20.066,70.612) 20.589,70.089 29.96,70.089 v1(30.037,70.166)
  Bottom Layer w0.254: X2.8@3.683,70.612 4.678,70.612 5.771,71.704 6.675,71.704 7.768,70.612 v1(20.066,70.612) ; v1(30.037,70.166) 30.442,70.572 30.442,82.667 29.951,83.158 29.951,83.974 30.251,84.274 30.251,87.474 30.032,87.693 30.032,92.135 31.627,93.73 U1.9@31.627,97.12
LCD_D2: U1.10 X2.9 | length 52.5
  Top Layer w0.254: v1(21.082,70.993) 21.382,70.693 29.356,70.693 v1(29.433,70.77)
  Bottom Layer w0.254: X2.9@6.223,68.072 6.726,68.575 19.299,68.575 21.082,70.358 v1(21.082,70.993) ; v1(29.433,70.77) 29.934,71.271 29.934,82.6 29.545,82.989 29.545,84.143 29.845,84.443 29.845,87.306 29.626,87.525 29.626,92.491 31.127,93.992 U1.10@31.127,97.12
LCD_D3: U1.11 X2.10 | length 55.4
  Top Layer w0.254: v1(21.844,71.755) 22.225,71.374 v1(28.829,71.374)
  Bottom Layer w0.254: X2.10@3.683,68.072 4.775,66.98 6.675,66.98 7.864,68.169 19.782,68.169 21.844,70.231 v1(21.844,71.755) ; v1(28.829,71.374) 29.337,71.882 29.337,82.623 29.139,82.821 29.139,84.311 29.337,84.509 29.337,87.239 29.22,87.356 29.22,92.847 30.627,94.254 U1.11@30.627,97.12
LCD_D4: U1.24 X2.11 | length 52.8
  Top Layer w0.254: X2.11@6.223,65.532 7.239,65.532 9.153,67.446 9.153,82.559 13.462,86.868 16.002,86.868 17.099,87.965 v1(17.099,102.62)
  Bottom Layer w0.254: v1(17.099,102.62) 17.145,102.574 v1@17.145,102.489 ; v1@17.188,102.532 17.276,102.62 U1.24@26.127,102.62
LCD_D5: U1.37 X2.12 | length 81.1
  Top Layer w0.254: X2.12@3.683,65.532 4.826,64.389 6.985,64.389 9.879,67.283 9.879,82.322 13.917,86.36 16.383,86.36 17.78,87.757 v1(17.78,116.459)
  Bottom Layer w0.254: v1(17.78,116.459) 18.288,115.951 29.21,115.951 30.127,115.034 U1.37@30.127,108.636
LCD_D6: U1.38 X2.13 | length 80.6
  Top Layer w0.254: X2.13@6.223,62.992 6.477,62.992 10.508,67.023 10.508,82.232 14.007,85.731 16.643,85.731 18.288,87.376 18.288,115.443 18.796,115.951 v1(18.796,117.221)
  Bottom Layer w0.254: v1(18.796,117.221) 19.177,116.84 29.464,116.84 30.627,115.677 U1.38@30.627,108.636